# Altium PCB UltraZohm_Digital_BreakoutBoard.PcbDoc
Units mm, origin at the board's own origin, x right, y up, seen from the top; angles counter-clockwise.
Board outline 50 x 80 mm, 2 copper layers (Top Layer, Bottom Layer); 11 components, 55 nets, 236 pads, 23 vias.
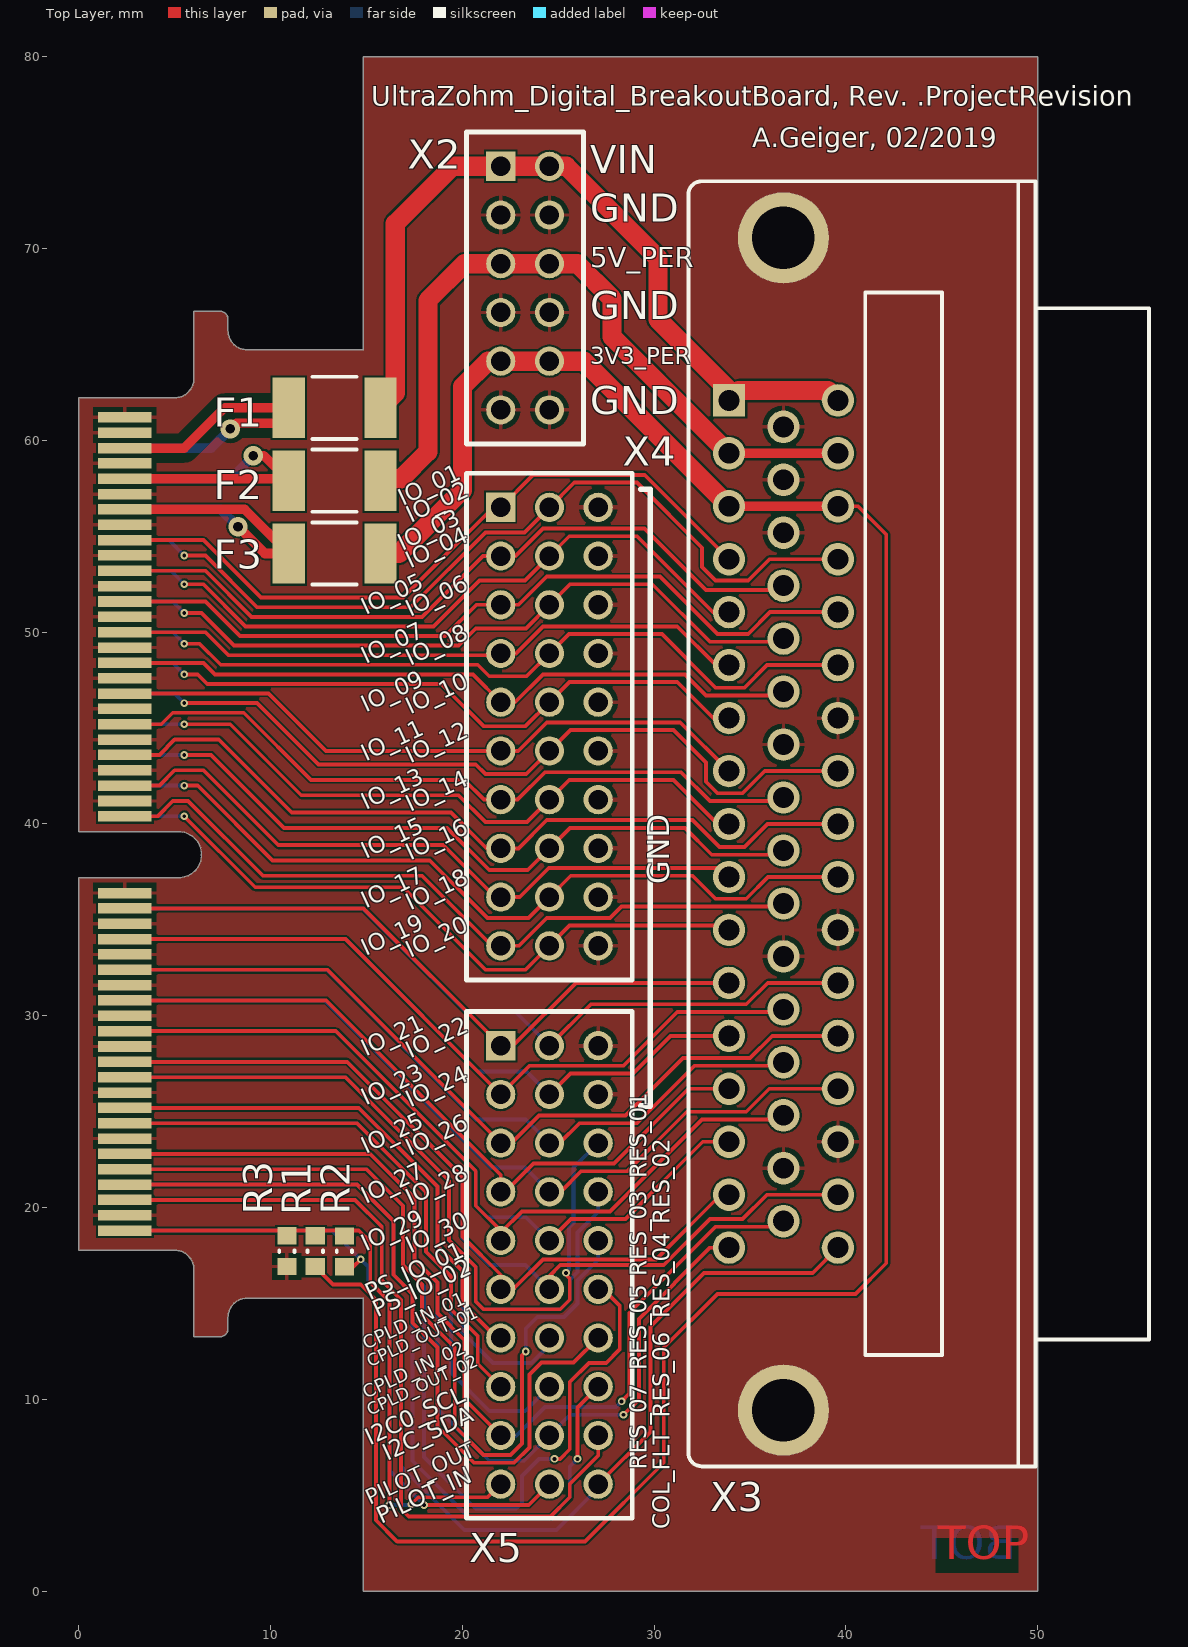
[diagram p0: Top Layer view]
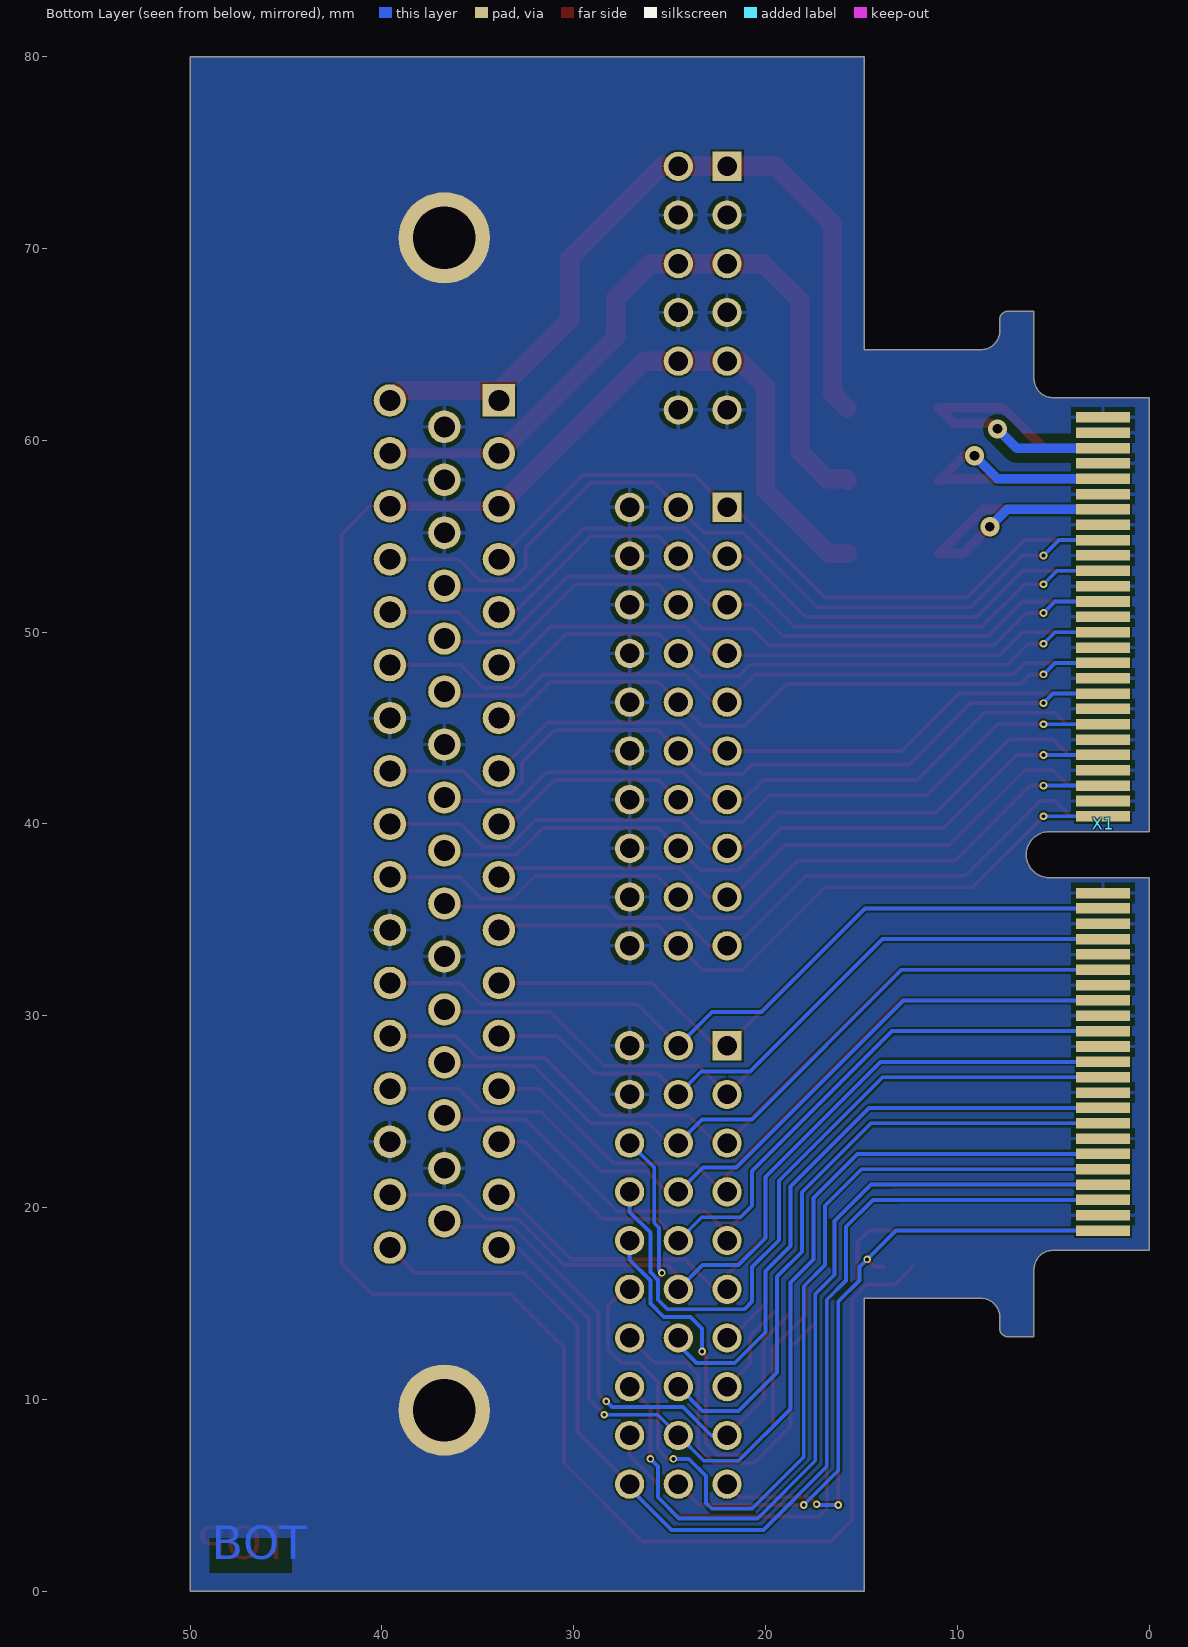
[diagram p1: Bottom Layer view, seen from below]
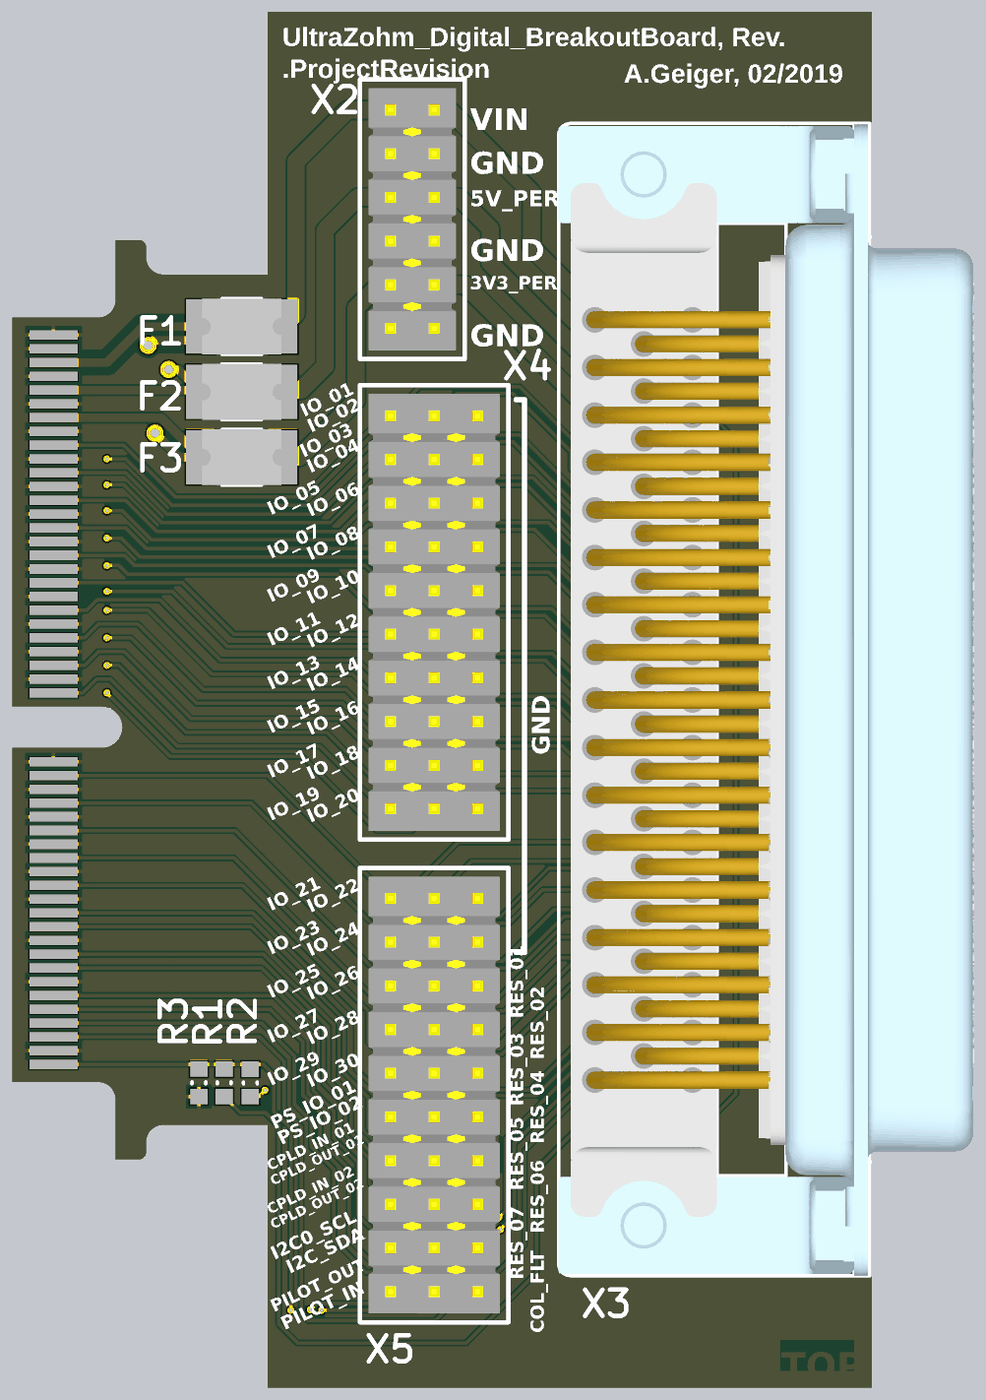
[diagram p2: 3D render of the assembled board from above, using the file's embedded part models]

## Layer stack, top to bottom
Top Solder: solder mask 0.0102, Solder Resist, Dk 3.5
Top Layer: signal copper 0.0356
Dielectric 1: dielectric 0.32, FR-4, Dk 4.8
Bottom Layer: signal copper 0.0356
Bottom Solder: solder mask 0.0102, Solder Resist, Dk 3.5

## Board outline
0.78,17.775 5.001,17.775 cw(c5.001,16.775) 6.001,16.775 6.001,13.275 7.38,13.275 ccw(c7.38,13.675) 7.78,13.675 7.78,14.275 cw(c8.78,14.275) 8.78,15.275 14.84,15.275 14.84,0 50.001,0 50.001,80 14.84,80 14.84,64.725 8.78,64.725 cw(c8.78,65.725) 7.78,65.725 7.78,66.325 ccw(c7.38,66.325) 7.38,66.725 6.001,66.725 6.001,63.225 cw(c5.001,63.225) 5.001,62.225 0,62.225 0,39.6 5.2,39.6 cw(c5.2,38.4) 5.2,37.2 0,37.2 0,17.775

## Design rules (kind name [scope] priority, off if disabled: settings)
Clearance Clearance_Power [OnLayer('L05_VCC') or InNet('VIN')] p1: gap=0.1 except(0.15: Via-Poly; 0.25: THPad-Poly; 0.3: Fill-Poly Poly-Poly Poly-Region; 0.5: Track-Poly)
Clearance [All] p2: gap=0.1
ComponentClearance [All] p1: gap=0.1 collisioncheckmode=3 verticalgap=0.1 showdistances=FALSE
DiffPairsRouting [All] p1: maxlimit=0.12 minlimit=0.12 mostfreqgap=0.12 toplayer_minwidth=0.1 toplayer_maxwidth=0.1 toplayer_prefwidth=0.1 bottomlayer_minwidth=0.1 bottomlayer_maxwidth=0.1 bottomlayer_prefwidth=0.1 maxuncoupledlength=12.7
Height [All] p1: minheight=0 maxheight=50 prefheight=12.7
HoleSize [All] p1: absolutevalues=TRUE maxlimit=4 minlimit=0.025 maxpercent=80.000 minpercent=20.000
PolygonConnect PolygonConnect_Therm [HoleSize > 2.6] p1: connectstyle=Direct reliefconductorwidth=0.254 reliefentries=4 polygonreliefangle="90 Angle" airgapwidth=0.254
PolygonConnect PolygonConnect_via [InPadClass('pad') or IsVia] p2: connectstyle=Direct reliefconductorwidth=0.254 reliefentries=4 polygonreliefangle="90 Angle" airgapwidth=0.254
PolygonConnect [All] p3: connectstyle=Relief reliefconductorwidth=0.2 reliefentries=4 polygonreliefangle="90 Angle" airgapwidth=0.25
RoutingVias [All] p1: holewidth=0.2 width=0.4 viastyle="Through Hole" minholewidth=0.2 minwidth=0.4 maxholewidth=0.5 maxwidth=1
SolderMaskExpansion [All] p1: expansion=0.102
Width [All] p1: maxlimit=10 minlimit=0.1 preferedwidth=0.1
26 further rules are at their usual default settings.

## Components (designator, comment, footprint, x,y, rotation, side; value= is the part's Value field where it differs from the comment)
F1 "PTC, 1.1A, 24V" 1812_PTC_Polyfuse_Littelfuse 13.344,61.701 r0 top
F2 "PTC, 1.1A, 24V" 1812_PTC_Polyfuse_Littelfuse 13.344,57.9 r0 top
F3 "PTC, 1.1A, 24V" 1812_PTC_Polyfuse_Littelfuse 13.344,54.1 r0 top
R1 "dnp" R_0603_N 12.326,17.727 r90 top
R2 "0R" R_0603_N 13.85,17.723 r270 top
R3 "dnp" R_0603_N 10.85,17.727 r90 top
X1 "HSEC8-150-01-XX-DV-A-BL-CARD" HSEC8-150-01-XX-DV-A-BL-CARD 0,40 r270 bottom
X2 "TSW-106-07-F-D" TSW-106-XX-XXX-D 23.271,67.94 r270 top
X3 "D-SUB 50p. female" 164A18759X 33.901,17.912 r90 top
X4 "TSW-110-07-F-T" TSW-110-XX-XXX-T 24.541,45.08 r270 top
X5 "TSW-110-07-F-T" TSW-110-XX-XXX-T 24.541,17.013 r270 top

## Footprints (in the part's own frame and the unit in brackets; to place one, negate y for a bottom-side part, rotate by r counter-clockwise, add the part's x,y. Pads: shape width x height; smd on the part's side, far side on the other; paste and mask are expansions set on the pad)
164A18759X [mm]
  rect 1.69x1.69 hole 1.09: 1(44.176,0)
  round 1.69 hole 1.09: 2(41.415,0) 3(38.654,0) 4(35.893,0) 5(33.132,0) 6(30.371,0) 7(27.61,0) 8(24.849,0) 9(22.088,0) 10(19.327,0) 11(16.566,0) 12(13.805,0) 13(11.044,0) 14(8.283,0) 15(5.522,0) 16(2.761,0) 17(0,0) 18(42.795,-2.84) 19(40.034,-2.84) 20(37.273,-2.84) 21(34.512,-2.84) 22(31.751,-2.84) 23(28.99,-2.84) 24(26.23,-2.84) 25(23.469,-2.84) 26(20.707,-2.84) 27(17.946,-2.84) 28(15.185,-2.84) 29(12.424,-2.84) 30(9.664,-2.84) 31(6.903,-2.84) 32(4.142,-2.84) 33(1.381,-2.84) 34(44.176,-5.68) 35(41.415,-5.68) 36(38.654,-5.68) 37(35.893,-5.68) 38(33.132,-5.68) 39(30.371,-5.68) 40(27.61,-5.68) 41(24.849,-5.68) 42(22.088,-5.68) 43(19.327,-5.68) 44(16.566,-5.68) 45(13.805,-5.68) 46(11.044,-5.68) 47(8.283,-5.68) 48(5.522,-5.68) 49(2.761,-5.68) 50(0,-5.68)
  round 4.76 hole 3.26: 51(-8.467,-2.84) 52(52.643,-2.84)
  silkscreen extent -11.4,-21.9 55.6,2.12, body extent -11.42,-22.05 55.58,2.13, height 16.35
1812_PTC_Polyfuse_Littelfuse [mm] "Chip Fuse, 2-Leads, Body 4.6x3.24mm"
  rect 1.68x3.14 smd: 1(-2.39,0) 2(2.39,0)
  silkscreen extent -1.15,-1.62 1.15,1.62, body extent -2.3,-1.62 2.3,1.62, height 1.15
HSEC8-150-01-XX-DV-A-BL-CARD [mm]
  rect 0.55x2.8 smd far side mask+0.05: 1(-21.2,-2.4) 3(-20.4,-2.4) 5(-19.6,-2.4) 7(-18.8,-2.4) 9(-18,-2.4) 11(-17.2,-2.4) 13(-16.4,-2.4) 15(-15.6,-2.4) 17(-14.8,-2.4) 19(-14,-2.4) 21(-13.2,-2.4) 23(-12.4,-2.4) 25(-11.6,-2.4) 27(-10.8,-2.4) 29(-10,-2.4) 31(-9.2,-2.4) 33(-8.4,-2.4) 35(-7.6,-2.4) 37(-6.8,-2.4) 39(-6,-2.4) 41(-5.2,-2.4) 43(-4.4,-2.4) 45(-3.6,-2.4) 47(-2.8,-2.4) 49(-2,-2.4) 51(-1.2,-2.4) 53(-0.4,-2.4) 55(3.6,-2.4) 57(4.4,-2.4) 59(5.2,-2.4) 61(6,-2.4) 63(6.8,-2.4) 65(7.6,-2.4) 67(8.4,-2.4) 69(9.2,-2.4) 71(10,-2.4) 73(10.8,-2.4) 75(11.6,-2.4) 77(12.4,-2.4) 79(13.2,-2.4) 81(14,-2.4) 83(14.8,-2.4) 85(15.6,-2.4) 87(16.4,-2.4) 89(17.2,-2.4) 91(18,-2.4) 93(18.8,-2.4) 95(19.6,-2.4) 97(20.4,-2.4) 99(21.2,-2.4)
  rect 0.55x2.8 smd mask+0.05: 2(-21.2,-2.4) 4(-20.4,-2.4) 6(-19.6,-2.4) 8(-18.8,-2.4) 10(-18,-2.4) 12(-17.2,-2.4) 14(-16.4,-2.4) 16(-15.6,-2.4) 18(-14.8,-2.4) 20(-14,-2.4) 22(-13.2,-2.4) 24(-12.4,-2.4) 26(-11.6,-2.4) 28(-10.8,-2.4) 30(-10,-2.4) 32(-9.2,-2.4) 34(-8.4,-2.4) 36(-7.6,-2.4) 38(-6.8,-2.4) 40(-6,-2.4) 42(-5.2,-2.4) 44(-4.4,-2.4) 46(-3.6,-2.4) 48(-2.8,-2.4) 50(-2,-2.4) 52(-1.2,-2.4) 54(-0.4,-2.4) 56(3.6,-2.4) 58(4.4,-2.4) 60(5.2,-2.4) 62(6,-2.4) 64(6.8,-2.4) 66(7.6,-2.4) 68(8.4,-2.4) 70(9.2,-2.4) 72(10,-2.4) 74(10.8,-2.4) 76(11.6,-2.4) 78(12.4,-2.4) 80(13.2,-2.4) 82(14,-2.4) 84(14.8,-2.4) 86(15.6,-2.4) 88(16.4,-2.4) 90(17.2,-2.4) 92(18,-2.4) 94(18.8,-2.4) 96(19.6,-2.4) 98(20.4,-2.4) 100(21.2,-2.4)
R_0603_N [mm] "SMD Resistor, Body 1.6x0.8mm, IPC Medium Density"
  rect 0.9x1 smd: 1(-0.8,0) 2(0.8,0)
  silkscreen extent -0.05,-0.4 0.05,0.4, body extent -0.85,-0.47 0.85,0.47, height 0.6
TSW-106-XX-XXX-D [mil] "Pinheader, 2.54mm Pitch"
  rect 60x60 hole 40 mask+3: 1(-250,-50)
  round 60 hole 40 mask+3: 2(-250,50) 3(-150,-50) 4(-150,50) 5(-50,-50) 6(-50,50) 7(50,-50) 8(50,50) 9(150,-50) 10(150,50) 11(250,-50) 12(250,50)
  silkscreen extent -320,-120 320,120, body extent -300,-100 300,100, height 330
TSW-110-XX-XXX-T [mil] "Pinheader, 2.54mm Pitch"
  rect 60x60 hole 40 mask+3: 1(-450,-100)
  round 60 hole 40 mask+3: 2(-450,0) 3(-450,100) 4(-350,-100) 5(-350,0) 6(-350,100) 7(-250,-100) 8(-250,0) 9(-250,100) 10(-150,-100) 11(-150,0) 12(-150,100) 13(-50,-100) 14(-50,0) 15(-50,100) 16(50,-100) 17(50,0) 18(50,100) 19(150,-100) 20(150,0) 21(150,100) 22(250,-100) 23(250,0) 24(250,100) 25(350,-100) 26(350,0) 27(350,100) 28(450,-100) 29(450,0) 30(450,100)
  silkscreen extent -520,-170 520,170, body extent -500,-150 500,150, height 330

## Part data
F1 F2 F3: library part Littelfuse_PTC_1812, "Resettable PTC Polyfuse SMD, 1812, automotive"
R1 R2 R3: library part R_0603, "SMD Resistor 0603"
X1: "Mating Card Layout for HSEC8-150-01-XX-DV-A-BL"
X2: library part TSW-106-XX-XXX-D, "Pin Header, 2.54mm"
X3: library part 164A18759X, "D-SUB, female, right angle, 50pos, 9.4mm pitch"
X4 X5: library part TSW-110-XX-XXX-T, "Pin Header, 2.54mm"

## Via types
v1: diameter 0.4, hole 0.2, Top Layer to Bottom Layer, 20 vias
v2: diameter 1, hole 0.5, Top Layer to Bottom Layer, 3 vias

## Nets (pads, with @x,y where several pads share a name; then routed paths per layer and width w, separated by ;. In a path a pad name is that pad's centre, name@x,y a point inside that pad or via, vN(x,y) a via of type N, cw(c..) or ccw(c..) an arc to the next point about the centre after c; other vN are vias at no path point)
3V3_PER: F3.1 X1.13 X1.14 | length 19
  Top Layer w0.5: X1.13 8.654,56.4 F3.1 9.701,54.1 v2(8.301,55.5)
  Bottom Layer w0.5: X1.14 7.401,56.4 v2(8.301,55.5)
3V3_PER_FUSED: F3.2 R1.1 X2.9 X2.10 X3.3 X3.36 | length 127.4
  Top Layer w0.2: R1.1 13.253,16 14.701,16 15.501,15.2 15.501,3.7 16.601,2.6 26.401,2.6 30.501,6.7 30.501,12.7 33.301,15.5 40.501,15.5 42.101,17.1 42.101,55.1 40.635,56.566 X3.36
  Top Layer w0.5: X3.3 X3.36
  Top Layer w1: F3.2 16.701,54.1 20.001,57.4 20.001,62.8 21.331,64.13 X2.9 X2.10 26.336,64.13 X3.3
5V_PER: F2.1 X1.9 X1.10 | length 18
  Top Layer w0.5: X1.9 F2.1@10.854,58 ; v2(9.101,59.2) 9.654,59.2 F2.1@10.854,58 ; F2.1 F2.1@10.854,58
  Bottom Layer w0.5: X1.10 7.901,58 v2(9.101,59.2)
5V_PER_FUSED: F2.2 X2.5 X2.6 X3.2 X3.35 | length 38.4
  Top Layer w0.5: X3.2 X3.35
  Top Layer w1: F2.2 15.834,58 16.801,58 18.201,59.4 18.201,67.3 20.111,69.21 X2.5 X2.6 25.991,69.21 27.801,67.4 27.801,65.4 33.874,59.327 X3.2
COLLECTIVE_FLT: X1.96 X3.50 X5.30 | length 60.5
  Top Layer w0.2: X5.30 29.801,8.303 29.801,13.8 32.601,16.6 38.269,16.6 X3.50
  Bottom Layer w0.2: X1.96 13.101,20.4 14.401,20.4 15.801,19 15.801,16.2 16.801,15.2 16.801,6.5 20.101,3.2 24.901,3.2 27.081,5.38 X5.30
CPLD_DIGIN_01: X1.83 X5.19 | length 27.4
  Top Layer w0.2: X1.83 14.601,25.2 18.701,21.1 18.701,18 20.001,16.7 20.001,15 21.798,13.203 X5.19
CPLD_DIGIN_02: X1.85 X5.22 | length 28.9
  Top Layer w0.2: X1.85 7.501,24.4 14.501,24.4 18.101,20.8 18.101,17.7 19.401,16.4 19.401,14.7 20.801,13.3 20.801,11.863 X5.22
CPLD_DIGOUT_01: X1.84 X5.20 | length 32.1
  Bottom Layer w0.2: X1.84 14.601,25.2 18.701,21.1 18.701,18 20.001,16.7 20.001,13.5 21.601,11.9 23.601,11.9 24.541,12.84 X5.20
CPLD_DIGOUT_02: X1.86 X5.23 | length 33.6
  Bottom Layer w0.2: X1.86 14.501,24.4 18.101,20.8 18.101,17.7 19.401,16.4 19.401,11.4 21.401,9.4 23.278,9.4 X5.23
DIG_IO_01: X1.17 X3.4 X4.1 | length 37.2
  Top Layer w0.2: X1.17 6.501,54.8 9.501,51.8 16.901,51.8 21.611,56.51 X4.1 23.691,58.2 29.505,58.2 X3.4
DIG_IO_02: X1.18 X3.37 X4.2 | length 44.5
  Top Layer w0.2: v1(5.501,54) 6.601,54 9.301,51.3 17.301,51.3 21.201,55.2 23.231,55.2 X4.2 25.831,57.8 29.101,57.8 32.501,54.4 32.501,53.4 33.201,52.7 34.901,52.7 36.006,53.805 X3.37
  Bottom Layer w0.2: X1.18 4.701,54.8 v1(5.501,54)
DIG_IO_03: X1.21 X3.21 X4.4 | length 38.7
  Top Layer w0.2: X1.21 6.601,53.2 9.001,50.8 17.901,50.8 21.071,53.97 X4.4 22.771,53.97 24.201,55.4 29.501,55.4 32.701,52.2 36.516,52.2 X3.21
DIG_IO_04: X1.22 X3.5 X4.5 | length 36.3
  Top Layer w0.2: v1(5.501,52.5) 6.501,52.5 8.701,50.3 18.501,50.3 20.901,52.7 23.271,52.7 X4.5 25.571,55 29.101,55 33.057,51.044 X3.5
  Bottom Layer w0.2: X1.22 4.801,53.2 v1(5.501,52.5)
DIG_IO_05: X1.25 X3.38 X4.7 | length 40.9
  Top Layer w0.2: X1.25 6.601,51.6 8.401,49.8 19.101,49.8 20.731,51.43 X4.7 22.931,51.43 24.401,52.9 30.301,52.9 33.301,49.9 34.901,49.9 36.045,51.044 X3.38
DIG_IO_06: X1.26 X3.22 X4.8 | length 37.9
  Top Layer w0.2: v1(5.501,51) 6.401,51 8.101,49.3 19.801,49.3 20.701,50.2 23.311,50.2 X4.8 25.611,52.5 29.901,52.5 32.901,49.5 36.577,49.5 X3.22
  Bottom Layer w0.2: X1.26 4.901,51.6 v1(5.501,51)
DIG_IO_07: X1.29 X3.6 X4.10 | length 33.5
  Top Layer w0.2: X1.29 6.601,50 7.801,48.8 21.911,48.8 X4.10 22.791,48.89 24.201,50.3 31.201,50.3 33.218,48.283 X3.6
DIG_IO_08: X1.30 X3.39 X4.11 | length 40.7
  Top Layer w0.2: v1(5.501,49.4) 6.301,49.4 7.401,48.3 20.801,48.3 21.401,47.7 23.351,47.7 X4.11 25.551,49.9 30.401,49.9 33.201,47.1 34.701,47.1 35.884,48.283 X3.39
  Bottom Layer w0.2: X1.30 4.901,50 v1(5.501,49.4)
DIG_IO_09: X1.33 X3.23 X4.13 | length 36.3
  Top Layer w0.2: X1.33 6.501,48.4 7.101,47.8 20.551,47.8 X4.13 22.751,46.35 24.201,47.8 31.601,47.8 32.701,46.7 36.538,46.7 X3.23
DIG_IO_10: X1.34 X3.7 X4.14 | length 34.6
  Top Layer w0.2: v1(5.501,47.8) 6.201,47.8 6.701,47.3 18.901,47.3 21.101,45.1 23.291,45.1 X4.14 25.591,47.4 31.201,47.4 33.079,45.522 X3.7
  Bottom Layer w0.2: X1.34 4.901,48.4 v1(5.501,47.8)
DIG_IO_11: X1.37 X3.8 X4.16 | length 34.4
  Top Layer w0.2: X1.37 9.901,46.8 12.891,43.81 X4.16 22.911,43.81 24.401,45.3 31.361,45.3 X3.8
DIG_IO_12: X1.38 X3.41 X4.17 | length 42.3
  Top Layer w0.2: v1(5.501,46.3) 9.301,46.3 12.501,43.1 20.701,43.1 21.201,42.6 23.331,42.6 X4.17 25.631,44.9 31.001,44.9 32.701,43.2 32.701,42.2 33.301,41.6 34.601,41.6 35.762,42.761 X3.41
  Bottom Layer w0.2: X1.38 5.001,46.8 v1(5.501,46.3)
DIG_IO_13: X1.41 X3.25 X4.19 | length 37.8
  Top Layer w0.2: X1.41 4.301,45.2 4.901,45.8 8.601,45.8 12.101,42.3 20.101,42.3 21.131,41.27 X4.19 22.871,41.27 24.301,42.7 31.401,42.7 32.901,41.2 36.56,41.2 X3.25
DIG_IO_14: X1.42 X3.9 X4.20 | length 35.5
  Top Layer w0.2: v1(5.501,45.2) 7.901,45.2 11.601,41.5 19.801,41.5 21.201,40.1 23.371,40.1 X4.20 25.571,42.3 31.001,42.3 33.301,40 X3.9
  Bottom Layer w0.2: X1.42 v1(5.501,45.2)
DIG_IO_15: X1.45 X3.42 X4.22 | length 41.5
  Top Layer w0.2: X1.45 4.201,43.6 5.001,44.4 7.301,44.4 11.101,40.6 19.401,40.6 21.271,38.73 X4.22 22.931,38.73 24.401,40.2 32.001,40.2 33.401,38.8 34.701,38.8 35.901,40 X3.42
DIG_IO_16: X1.46 X3.26 X4.23 | length 38.4
  Top Layer w0.2: v1(5.501,43.6) 6.901,43.6 10.701,39.8 19.201,39.8 21.401,37.6 23.411,37.6 X4.23 25.611,39.8 31.601,39.8 33.001,38.4 36.521,38.4 X3.26
  Bottom Layer w0.2: X1.46 v1(5.501,43.6)
DIG_IO_17: X1.49 X3.10 X4.25 | length 35.4
  Top Layer w0.2: X1.49 4.201,42 5.001,42.8 6.501,42.8 10.401,38.9 19.001,38.9 21.711,36.19 X4.25 22.991,36.19 24.501,37.7 33.439,37.7 X3.10
DIG_IO_18: X1.50 X3.43 X4.26 | length 41.9
  Top Layer w0.2: v1(5.501,42) 6.201,42 10.101,38.1 18.301,38.1 21.301,35.1 23.451,35.1 X4.26 25.651,37.3 32.001,37.3 33.201,36.1 34.801,36.1 35.94,37.239 X3.43
  Bottom Layer w0.2: X1.50 v1(5.501,42)
DIG_IO_19: X1.53 X3.27 X4.28 | length 38.7
  Top Layer w0.2: X1.53 4.101,40.4 4.901,41.2 5.701,41.2 9.601,37.3 17.901,37.3 21.551,33.65 X4.28 22.951,33.65 24.401,35.1 27.701,35.1 28.301,35.7 36.582,35.7 X3.27
DIG_IO_20: X1.54 X3.11 X4.29 | length 35.9
  Top Layer w0.2: v1(5.501,40.4) 9.201,36.7 16.901,36.7 21.201,32.4 23.291,32.4 X4.29 25.591,34.7 33.678,34.7 X3.11
  Bottom Layer w0.2: X1.54 v1(5.501,40.4)
DIG_IO_21: X1.57 X3.12 X5.1 | length 35.8
  Top Layer w0.2: X1.57 7.501,35.6 14.844,35.6 X5.1 22.644,28.443 25.918,31.717 X3.12
DIG_IO_22: X1.58 X3.45 X5.2 | length 41.5
  Top Layer w0.2: X5.2 26.698,30.6 34.801,30.6 35.918,31.717 X3.45
  Bottom Layer w0.2: X1.58 14.801,35.6 20.201,30.2 22.784,30.2 X5.2
DIG_IO_23: X1.61 X3.29 X5.4 | length 39.5
  Top Layer w0.2: X1.61 7.501,34 13.904,34 X5.4 23.498,27.4 28.401,27.4 31.201,30.2 36.604,30.2 X3.29
DIG_IO_24: X1.62 X3.13 X5.5 | length 36.1
  Top Layer w0.2: X5.5 25.638,27 28.901,27 30.857,28.956 X3.13
  Bottom Layer w0.2: X1.62 13.901,34 20.801,27.1 23.344,27.1 X5.5
DIG_IO_25: X1.65 X3.46 X5.7 | length 43.2
  Top Layer w0.2: X1.65 7.501,32.4 12.964,32.4 X5.7 22.564,23.363 24.001,24.8 28.501,24.8 31.501,27.8 35.001,27.8 36.157,28.956 X3.46
DIG_IO_26: X1.66 X3.30 X5.8 | length 39.8
  Top Layer w0.2: X5.8 25.064,23.363 26.101,24.4 29.101,24.4 32.101,27.4 36.565,27.4 X3.30
  Bottom Layer w0.2: X1.66 12.901,32.4 20.701,24.6 23.304,24.6 X5.8
DIG_IO_27: X1.69 X3.14 X5.10 | length 38.4
  Top Layer w0.2: X1.69 7.501,30.8 12.901,30.8 22.001,21.7 X5.10 22.224,20.823 23.701,22.3 27.901,22.3 31.796,26.195 X3.14
DIG_IO_28: X1.70 X3.47 X5.11 | length 43.5
  Top Layer w0.2: X5.11 25.124,20.823 26.201,21.9 28.601,21.9 31.701,25 34.801,25 35.996,26.195 X3.47
  Bottom Layer w0.2: X1.70 12.801,30.8 21.501,22.1 23.264,22.1 X5.11
DIG_IO_29: X1.73 X3.31 X5.13 | length 42.8
  Top Layer w0.2: X1.73 7.401,29.2 13.401,29.2 20.701,21.9 20.701,20.1 22.001,18.8 X5.13@22.001,18.7 ; X5.13 X5.13@22.001,18.7 ; X3.31 36.526,24.6 32.501,24.6 27.701,19.8 23.101,19.8 X5.13@22.001,18.7
DIG_IO_30: X1.74 X3.15 X5.14 | length 39.2
  Top Layer w0.2: X5.14 25.658,19.4 28.501,19.4 32.535,23.434 X3.15
  Bottom Layer w0.2: X1.74 13.401,29.2 20.701,21.9 20.701,20.1 21.301,19.5 23.324,19.5 X5.14
DIG_RES_01: X1.79 X5.9 | length 40.2
  Top Layer w0.2: X1.79 7.501,26.8 13.901,26.8 19.301,21.4 19.301,18.3 20.701,16.9 20.701,15.1 21.101,14.7 25.101,14.7 25.601,15.2 25.601,16.3 25.401,16.5 v1(25.401,16.6)
  Bottom Layer w0.2: v1(25.401,16.6) 25.551,16.75 25.551,18.95 25.801,19.2 25.801,22.083 X5.9
DIG_RES_02: X1.80 X5.12 | length 37.5
  Bottom Layer w0.2: X1.80 13.901,26.8 19.301,21.4 19.301,18.3 20.701,16.9 20.701,15.1 21.101,14.7 25.101,14.7 25.601,15.2 25.601,16.234 26.001,16.634 26.001,18.7 27.081,19.78 X5.12
DIG_RES_03: X1.91 X5.15 | length 45.3
  Top Layer w0.2: X1.91 15.001,22 16.901,20.1 16.901,17 17.901,16 17.901,14.4 19.601,12.7 19.601,8.6 21.101,7.1 22.501,7.1 23.101,7.7 23.101,12.3 v1(23.301,12.5)
  Bottom Layer w0.2: v1(23.301,12.5) 23.301,13.7 23.901,14.3 25.301,14.3 26.001,15 26.001,16.2 27.081,17.28 X5.15
DIG_RES_04: X1.92 X5.18 | length 50.7
  Top Layer w0.2: v1(24.801,6.9) 25.101,6.9 25.601,7.4 25.601,10.9 26.601,11.9 27.501,11.9 28.201,12.6 28.201,14.9 27.358,15.743 X5.18 X5.18@27.081,15.28
  Bottom Layer w0.2: X1.92 13.601,22 15.001,22 16.901,20.1 16.901,17 18.001,15.9 18.001,7 20.701,4.3 22.801,4.3 23.101,4.6 23.101,6 24.001,6.9 v1(24.801,6.9)
DIG_RES_05: X1.93 X5.21 | length 40.5
  Top Layer w0.2: X1.93 7.501,21.2 14.501,21.2 16.401,19.3 16.401,16.5 17.401,15.5 17.401,14 18.701,12.7 18.701,8.6 20.601,6.7 22.701,6.7 23.501,7.5 23.501,11.3 24.124,11.923 25.801,11.923 X5.21
DIG_RES_06: X1.94 X5.24 | length 44
  Top Layer w0.2: v1(26.001,6.9) 26.001,9.583 X5.24
  Bottom Layer w0.2: X1.94 13.501,21.2 14.501,21.2 16.401,19.3 16.401,16.5 17.401,15.5 17.401,6.8 20.401,3.8 24.501,3.8 25.601,4.9 25.601,6.5 v1(26.001,6.9)
DIG_RES_07: X1.95 X5.27 | length 42.3
  Top Layer w0.2: X1.95 14.401,20.4 15.801,19 15.801,16.2 16.801,15.2 16.801,4.3 17.201,3.9 24.601,3.9 25.601,4.9 25.601,5.6 27.081,7.08 X5.27
GND: R3.1 X1.1 X1.2 X1.3 X1.4 X1.7 X1.8 X1.11 X1.12 X1.15 X1.16 X1.19 X1.20 X1.23 X1.24 X1.27 X1.28 X1.31 X1.32 X1.35 X1.36 X1.39 X1.40 X1.43 X1.44 X1.47 X1.48 X1.51 X1.52 X1.55 X1.56 X1.59 X1.60 X1.63 X1.64 X1.67 X1.68 X1.71 X1.72 X1.75 X1.76 X1.81 X1.82 X1.87 X1.88 X1.97 X1.98 X2.3 X2.4 X2.7 X2.8 X2.11 X2.12 X3.18 X3.19 X3.20 X3.24 X3.28 X3.32 X3.40 X3.44 X3.48 X3.51 X3.52 X4.3 X4.6 X4.9 X4.12 X4.15 X4.18 X4.21 X4.24 X4.27 X4.30 X5.3 X5.6
I2C0_SCL: X1.89 X3.33 X5.25 | length 52.1
  Top Layer w0.2: X1.89 15.201,22.8 17.501,20.5 17.501,17.3 18.701,16.1 18.701,14.5 20.101,13.1 20.101,10.023 X5.25 ; v1(28.301,9.9) 28.701,10.3 28.701,14.5 33.201,19 36.448,19 X3.33
  Bottom Layer w0.2: X5.25 22.824,8.123 24.301,9.6 28.001,9.6 v1(28.301,9.9)
I2C0_SDA: X1.90 X3.17 X5.26 | length 50.9
  Top Layer w0.2: v1(28.401,9.2) 29.201,10 29.201,14.2 32.913,17.912 X3.17
  Bottom Layer w0.2: X1.90 15.201,22.8 17.501,20.5 17.501,17.3 18.701,16.1 18.701,9.5 21.401,6.8 23.218,6.8 X5.26 25.618,9.2 v1(28.401,9.2)
PILOT_IN: R2.2 X1.100 X5.29 | length 35.1
  Top Layer w0.2: R2.2 14.324,16.923 v1(14.701,17.3) ; v1(18.001,4.5) 23.458,4.5 X5.29
  Bottom Layer w0.2: X1.100 13.201,18.8 v1(14.701,17.3) 15.101,16.9 15.101,16.2 16.201,15.1 16.201,6.3 v1(18.001,4.5)
PILOT_OUT: R1.2 R2.1 R3.2 X1.99 X5.28 | length 33.4
  Top Layer w0.2: X1.99 14.601,18.8 15.201,18.2 15.201,16.1 16.201,15.1 v1(16.201,4.5) ; v1(17.334,4.533) 17.701,4.9 21.318,4.9 X5.28
  Bottom Layer w0.2: v1(16.201,4.5) 17.301,4.5 v1(17.334,4.533)
PS_DIG_GPIO_01: X1.77 X3.16 X5.16 | length 40.7
  Top Layer w0.2: X1.77 14.001,27.6 20.001,21.6 20.001,18.5 22.001,16.5 X5.16 22.644,15.743 24.201,17.3 30.101,17.3 33.474,20.673 X3.16
PS_DIG_GPIO_02: X1.78 X3.49 X5.17 | length 46.4
  Top Layer w0.2: X5.17 24.541,16.44 25.101,17 30.501,17 32.901,19.4 34.601,19.4 35.874,20.673 X3.49
  Bottom Layer w0.2: X1.78 14.001,27.6 20.001,21.6 20.001,18.4 21.401,17 23.284,17 X5.17
VIN: F1.1 X1.5 X1.6 | length 18.9
  Top Layer w0.5: X1.5 5.501,59.6 7.602,61.701 F1.1 10.954,61.653 10.201,60.9 8.201,60.9 v2(7.901,60.6)
  Bottom Layer w0.5: X1.6 6.901,59.6 v2(7.901,60.6)
VIN_FUSED: F1.2 X2.1 X2.2 X3.1 X3.34 | length 41.9
  Top Layer w1: F1.2 16.501,62.468 16.501,71.3 19.491,74.29 X2.1 X2.2 25.411,74.29 30.201,69.5 30.201,66.3 33.901,62.6 X3.1 34.413,62.6 39.068,62.6 X3.34

## Polygon pours and split planes (outlines as drawn)
GND on Top Layer "GND_Top_Plane" (solid, pour order 0): 0.78,17.775 5.001,17.775 cw(c5.001,16.775) 6.001,16.775 6.001,13.275 7.38,13.275 ccw(c7.38,13.675) 7.78,13.675 7.78,14.275 cw(c8.78,14.275) 8.78,15.275 14.84,15.275 14.84,0 50,0 50,80 14.84,80 14.84,64.725 8.78,64.725 cw(c8.78,65.725) 7.78,65.725 7.78,66.325 ccw(c7.38,66.325) 7.38,66.725 6.001,66.725 6.001,63.225 cw(c5.001,63.225) 5.001,62.225 0,62.225 0,39.6 5.2,39.6 cw(c5.2,38.4) 5.2,37.2 0,37.2 0,17.775
GND on Bottom Layer "GND_Bot_Plane" (solid, pour order 1): 0.78,17.775 5.001,17.775 cw(c5.001,16.775) 6.001,16.775 6.001,13.275 7.38,13.275 ccw(c7.38,13.675) 7.78,13.675 7.78,14.275 cw(c8.78,14.275) 8.78,15.275 14.84,15.275 14.84,0 50,0 50,80 14.84,80 14.84,64.725 8.78,64.725 cw(c8.78,65.725) 7.78,65.725 7.78,66.325 ccw(c7.38,66.325) 7.38,66.725 6.001,66.725 6.001,63.225 cw(c5.001,63.225) 5.001,62.225 0,62.225 0,39.6 5.2,39.6 cw(c5.2,38.4) 5.2,37.2 0,37.2 0,17.775

## Other copper
Top Layer:
  text "TOP" at 44.775,1.095 h3
Bottom Layer:
  text "BOT" at 48.872,1.095 h3

## Silkscreen, mask and mechanical layers (free items; w line width, h text height)
Top Overlay:
  lines w0.3: 29.301,25.3 29.801,25.3 29.801,57.45 29.301,57.45
  text "UltraZohm_Digital_BreakoutBoard, Rev. .ProjectRevision" at 15.253,77.103 h1.75
  text "A.Geiger, 02/2019" at 35.116,74.955 h1.75
  text "VIN" at 26.664,73.442 h2.5
  text "GND" at 26.667,70.902 h2.5
  text "5V_PER" at 26.667,68.662 h1.8
  text "GND" at 26.667,65.822 h2.5
  text "3V3_PER" at 26.667,63.682 h1.5
  text "GND" at 26.667,60.869 h2.5
  text "IO_01" at 17.032,56.313 h1.5 r25
  text "IO_02" at 17.432,55.413 h1.5 r25
  text "IO_03" at 17.001,53.952 h1.5 r25
  text "IO_04" at 17.401,53.052 h1.5 r25
  text "IO_05" at 15.101,50.612 h1.5 r25
  text "IO_06" at 17.401,50.512 h1.5 r25
  text "IO_07" at 15.101,48.072 h1.5 r25
  text "IO_08" at 17.401,47.972 h1.5 r25
  text "IO_09" at 15.101,45.532 h1.5 r25
  text "IO_10" at 17.401,45.432 h1.5 r25
  text "IO_11" at 15.101,42.992 h1.5 r25
  text "IO_12" at 17.401,42.892 h1.5 r25
  text "IO_13" at 15.101,40.452 h1.5 r25
  text "IO_14" at 17.401,40.352 h1.5 r25
  text "IO_15" at 15.101,37.912 h1.5 r25
  text "IO_16" at 17.401,37.812 h1.5 r25
  text "GND" at 31.188,36.846 h2 r90
  text "IO_17" at 15.101,35.312 h1.5 r25
  text "IO_18" at 17.401,35.212 h1.5 r25
  text "IO_19" at 15.101,32.832 h1.5 r25
  text "IO_20" at 17.401,32.732 h1.5 r25
  text "IO_21" at 15.101,27.592 h1.5 r25
  text "IO_22" at 17.401,27.492 h1.5 r25
  text "IO_23" at 15.101,25.052 h1.5 r25
  text "IO_24" at 17.401,24.952 h1.5 r25
  text "IO_25" at 15.101,22.512 h1.5 r25
  text "IO_26" at 17.401,22.412 h1.5 r25
  text "RES_01" at 29.901,21.532 h1.5 r90
  text "IO_27" at 15.101,19.912 h1.5 r25
  text "IO_28" at 17.401,19.812 h1.5 r25
  text "RES_02" at 31.101,19.132 h1.5 r90
  text "IO_29" at 15.101,17.432 h1.5 r25
  text "IO_30" at 17.401,17.332 h1.5 r25
  text "RES_03" at 29.901,16.432 h1.5 r90
  text "PS_IO_01" at 15.301,14.892 h1.5 r25
  text "RES_04" at 31.101,14.232 h1.5 r90
  text "PS_IO_02" at 15.701,13.992 h1.5 r25
  text "CPLD_IN_01" at 15.101,12.352 h1.2 r25
  text "RES_05" at 29.901,11.532 h1.5 r90
  text "CPLD_OUT_01" at 15.301,11.452 h1.1 r25
  text "CPLD_IN_02" at 15.101,9.812 h1.2 r25
  text "RES_06" at 31.101,9.032 h1.5 r90
  text "CPLD_OUT_02" at 15.301,8.912 h1.1 r25
  text "I2C0_SCL" at 15.301,7.312 h1.5 r25
  text "I2C_SDA" at 16.201,6.512 h1.5 r25
  text "RES_07" at 29.901,6.332 h1.5 r90
  text "PILOT_OUT" at 15.301,4.232 h1.4 r25
  text "PILOT_IN" at 15.901,3.232 h1.5 r25
  text "COL_FLT" at 31.101,3.232 h1.5 r90
Mechanical 1:
  lines w0.2: 14.84,15.275 14.84,0 50,0 50,80 14.84,80 14.84,64.725